# EAGLE board core_manual (EAGLE 6.4)
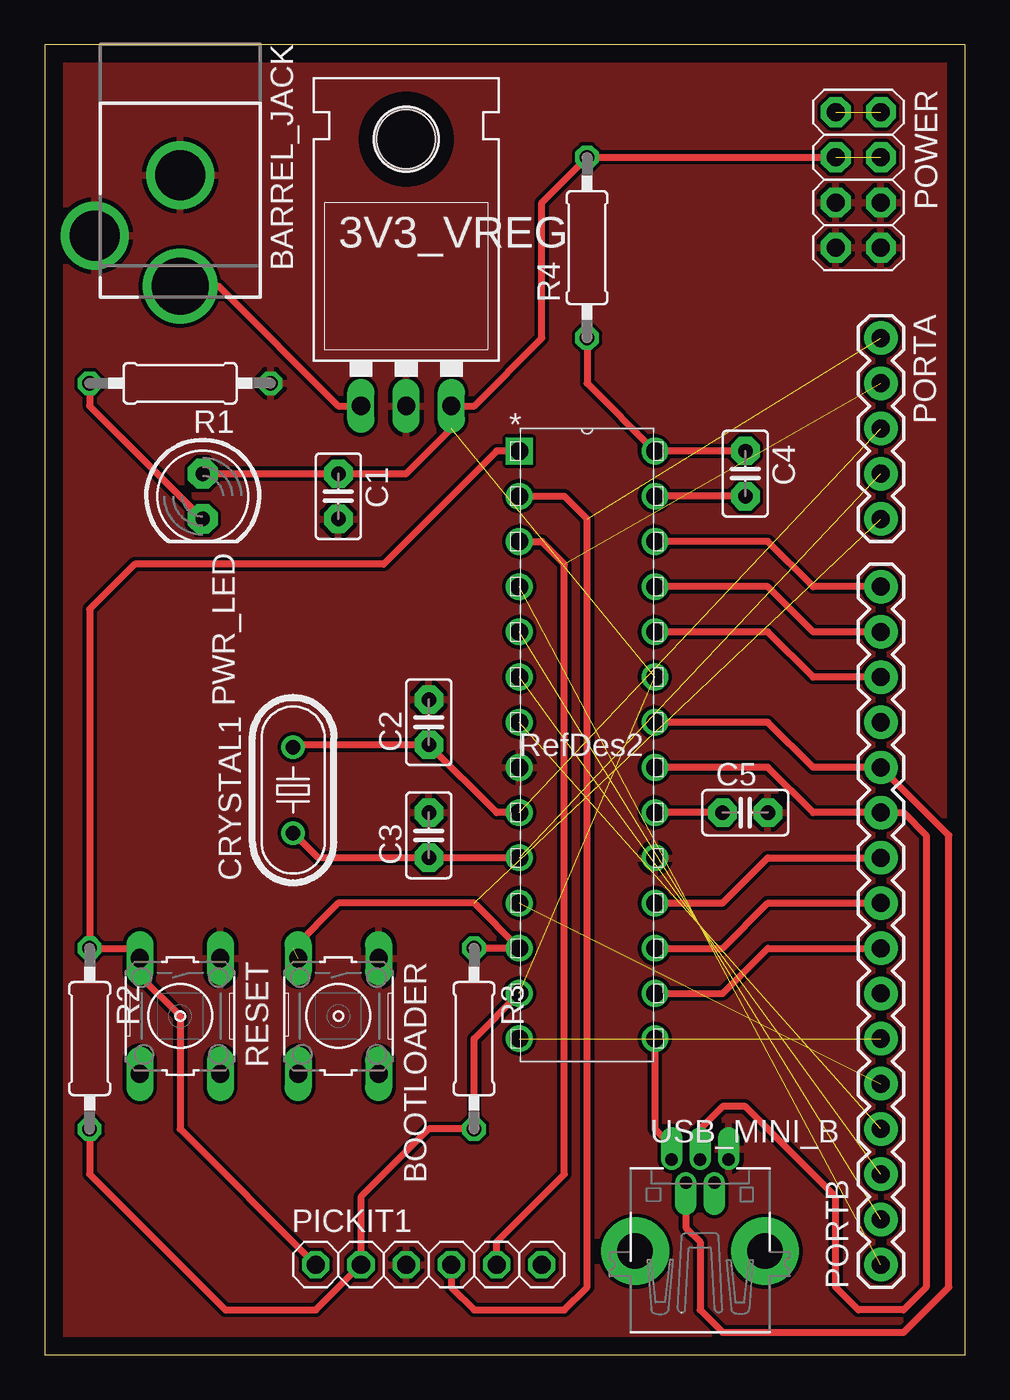
[diagram p0: board, top side]
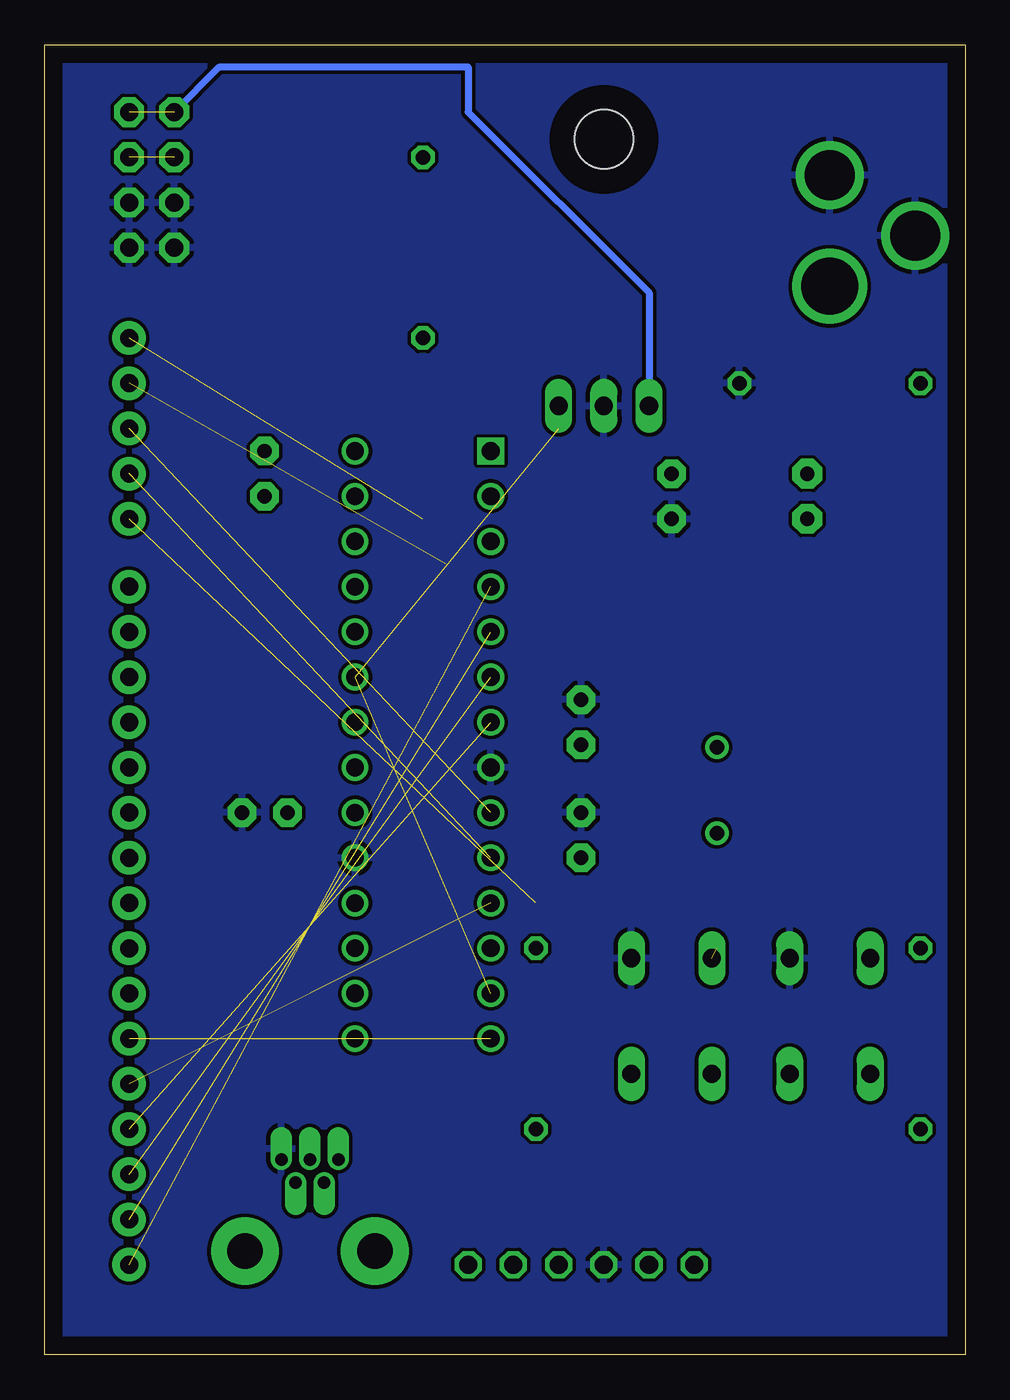
[diagram p1: board, bottom side, seen from below]

Size 51.74 x 73.65 mm. Coordinates in mm from the lower left corner, seen from the top.
Outline: 0,0 51.74,0 51.74,73.65 0,73.65 0,0
Copper layers (1*16): Top 0.035mm / dielectric 1.5mm / Bottom 0.035mm
Design rules "default": minimum track width 10mil, minimum drill 24mil, track to track 8mil, track to pad 8mil, pad to pad 8mil, via to via 8mil, smd to smd 8mil, copper to edge 40mil, drill to drill 8mil, minimum pad ring 10mil, minimum via ring 8mil, stop-mask expansion 4mil, vias tented up to drill 0mil, thermal gap 10mil

## Footprints (pad centres in the part's own frame; a part is rotated, then mirrored left to right if it is on the bottom)
TO-220-ALT = drill 1.016 long: GND 0,-3.81; IN -2.54,-3.81; OUT 2.54,-3.81 | hole 3.302: 0,11.176
DCJACK_2MM_PTH = drill 2.8: GND 0,7.35; GNDBREAK 4.8,10.75 | drill 3.2: PWR 0,13.6
B3F-10XX = drill 1.016 long: 1 -3.251,2.261; 2 3.251,2.261; 3 -3.251,-2.261; 4 3.251,-2.261
C2.5-2 = drill 0.813 pad 1.6 octagon: 1 -1.27,0; 2 1.27,0
HC49U-V = drill 0.813: 1 -2.413,0; 2 2.413,0
1X06 = drill 1.016 octagon: 1 -6.35,0; 2 -3.81,0; 3 -1.27,0; 4 1.27,0; 5 3.81,0; 6 6.35,0
1X05 = drill 1.016 pad 1.88: 1 0,0; 2 2.54,0; 3 5.08,0; 4 7.62,0; 5 10.16,0
1X16 = drill 1.016 pad 1.88: 1 0,0; 2 2.54,0; 3 5.08,0; 4 7.62,0; 5 10.16,0; 6 12.7,0; 7 15.24,0; 8 17.78,0; 9 20.32,0; 10 22.86,0; 11 25.4,0; 12 27.94,0; 13 30.48,0; 14 33.02,0; 15 35.56,0; 16 38.1,0
2X04 = drill 1.016 pad 1.676 octagon: 1 -3.81,-1.27; 2 -3.81,1.27; 3 -1.27,-1.27; 4 -1.27,1.27; 5 1.27,-1.27; 6 1.27,1.27; 7 3.81,-1.27; 8 3.81,1.27
LED5MM = drill 0.813 pad 1.676 octagon: A -1.27,0; K 1.27,0
0207/10 = drill 0.813 octagon: 1 -5.08,0; 2 5.08,0
SPDIP28_300MC = drill 0.991 square: 1 -7.62,33.02 | drill 0.991: 2 -7.62,30.48; 3 -7.62,27.94; 4 -7.62,25.4; 5 -7.62,22.86; 6 -7.62,20.32; 7 -7.62,17.78; 8 -7.62,15.24; 9 -7.62,12.7; 10 -7.62,10.16; 11 -7.62,7.62; 12 -7.62,5.08; 13 -7.62,2.54; 14 -7.62,0; 15 0,0; 16 0,2.54; 17 0,5.08; 18 0,7.62; 19 0,10.16; 20 0,12.7; 21 0,15.24; 22 0,17.78; 23 0,20.32; 24 0,22.86; 25 0,25.4; 26 0,27.94; 27 0,30.48; 28 0,33.02
USB-MINIB-THM-MOLEX = drill 0.7 offset: D+ 0,9.72; D- -0.8,8.42; GND 1.6,9.72; ID 0.8,8.42; VBUS -1.6,9.72 | drill 2 pad 3.81: GND1 -3.65,4.57; GND4 3.65,4.57

## Placement (x,y rotation side)
3V3_VREG  3.3  [TO-220-ALT]  20.32,57.15 0 top
BARREL_JACK  [DCJACK_2MM_PTH]  7.62,73.66 180 top
BOOTLOADER  [B3F-10XX]  16.51,19.05 270 top
C1  .1uF  [C2.5-2]  16.51,48.26 270 top
C2  22pF  [C2.5-2]  21.59,35.56 90 top
C3  22pF  [C2.5-2]  21.59,29.21 90 top
C4  .1uF  [C2.5-2]  39.37,49.53 270 top
C5  .1uF  [C2.5-2]  39.37,30.48 0 top
CRYSTAL1  20M  [HC49U-V]  13.97,31.75 90 top
PICKIT1  [1X06]  21.59,5.08 0 top
PORTA  [1X05]  46.99,57.15 270 top
PORTB  M16PTH  [1X16]  46.99,5.08 90 top
POWER  [2X04]  45.72,66.04 270 top
PWR_LED  [LED5MM]  8.89,48.26 270 top
R1  47  [0207/10]  7.62,54.61 180 top
R2  10K  [0207/10]  2.54,17.78 270 top
R3  10K  [0207/10]  24.13,17.78 270 top
R4  10K  [0207/10]  30.48,62.23 90 top
RESET  [B3F-10XX]  7.62,19.05 270 top
U1  PIC32MX230F064B-  [SPDIP28_300MC]  34.29,17.78 0 top
USB_MINI_B  [USB-MINIB-THM-MOLEX]  36.83,1.27 0 top

## Library data of the parts
3V3_VREG = SparkFun-PowerIC
BARREL_JACK PICKIT1 POWER PWR_LED USB_MINI_B = adafruit
BOOTLOADER RESET = switch-omron; MPN: B3F-1000; OC_FARNELL: 176432; OC_NEWARK: 36M3542
C1-C5 = capacitor-wima
CRYSTAL1 = crystal; OC_FARNELL: 1666969; OC_NEWARK: unknown
PORTA PORTB = SparkFun-Connectors
R1-R4 = resistor
U1 = uSensor

## Nets
+3V3: 3V3_VREG.OUT C1.1 PICKIT1.2 POWER.3 POWER.4 PWR_LED.A R2.2 R3.2 R4.2 U1.13 U1.23
+5V: 3V3_VREG.IN BARREL_JACK.PWR POWER.1 POWER.2
AVDD: C4.1 R4.1 U1.28
AVSS: C4.2 U1.27
D+: PORTB.11 U1.21 USB_MINI_B.D+
D-: PORTB.12 U1.22 USB_MINI_B.D-
GND: 3V3_VREG.GND BARREL_JACK.GND BARREL_JACK.GNDBREAK BOOTLOADER.1 C1.2 C2.2 C3.2 C5.2 PICKIT1.3 POWER.5 POWER.6 POWER.7 POWER.8 R1.1 RESET.1 U1.8 U1.19 USB_MINI_B.GND
MCLR: PICKIT1.1 R2.1 RESET.3 U1.1
N$5: PWR_LED.K R1.2
OSC1: C2.1 CRYSTAL1.2 PORTA.3 U1.9
OSC2: C3.1 CRYSTAL1.1 PORTA.4 U1.10
RA0: PICKIT1.4 PORTA.1 U1.2
RA1: PICKIT1.5 PORTA.2 U1.3
RA4: BOOTLOADER.3 PORTA.5 R3.1 U1.12
RB0: PORTB.1 U1.4
RB1: PORTB.2 U1.5
RB2: PORTB.3 U1.6
RB3: PORTB.4 U1.7
RB4: PORTB.5 U1.11
RB5: PORTB.6 U1.14
RB7: PORTB.8 U1.16
RB8: PORTB.9 U1.17
RB9: PORTB.10 U1.18
RB13: PORTB.14 U1.24
RB14: PORTB.15 U1.25
RB15: PORTB.16 U1.26
VBUS: U1.15 USB_MINI_B.VBUS
VCAP: C5.1 U1.20

## Tracks (layer width: path | path; a pad name or v marks a point on that pad's centre or on a via)
+3V3  (3 unrouted)
  Top 0.406: PWR_LED.A C1.1 20.32,49.53 22.86,52.07 3V3_VREG.OUT 24.13,53.34 27.94,57.15 27.94,64.77 R4.2 POWER.3 | R2.2 2.54,10.16 10.16,2.54 15.24,2.54 PICKIT1.2 17.78,8.89 21.59,12.7 R3.2 24.13,17.78 U1.13
+5V  (1 unrouted)
  Top 0.406: BARREL_JACK.PWR 9.79,60.06 16.51,53.34 3V3_VREG.IN
  Bottom 0.406: POWER.1 41.91,72.39 27.94,72.39 27.94,69.85 17.78,59.69 3V3_VREG.IN
AVDD
  Top 0.406: C4.1 U1.28 30.48,54.61 R4.1
AVSS
  Top 0.406: C4.2 U1.27
D+
  Top 0.406: USB_MINI_B.D+ 36.83,12.7 38.1,13.97 39.37,13.97 44.45,8.89 44.45,3.81 45.72,2.54 48.26,2.54 49.53,3.81 49.53,29.21 48.26,30.48 PORTB.11 43.18,30.48 40.64,33.02 U1.21
D-
  Top 0.406: USB_MINI_B.D- 36.03,7.15 36.83,6.35 36.83,2.54 38.1,1.27 48.26,1.27 50.8,3.81 50.8,29.21 PORTB.12 43.18,33.02 40.64,35.56 U1.22
GND
  pour Top: -6.35,85.09 -6.35,-26.67 115.57,-26.67 115.57,97.79 -6.35,97.79
  pour Bottom: -5.08,76.2 54.61,76.2 54.61,-6.35 -5.08,-6.35
MCLR
  Top 0.406: U1.1 25.4,50.8 19.05,44.45 5.08,44.45 2.54,41.91 R2.1 4.8,22.86 RESET.3 5.36,21.31 7.62,19.05 7.62,12.7 PICKIT1.1
N$5
  Top 0.406: R1.2 2.54,53.34 PWR_LED.K
OSC1  (1 unrouted)
  Top 0.406: U1.9 25.4,30.48 C2.1 14.1,34.29 CRYSTAL1.2
OSC2  (1 unrouted)
  Top 0.406: U1.10 C3.1 15.37,27.94 CRYSTAL1.1
RA0  (1 unrouted)
  Top 0.406: U1.2 29.21,48.26 30.48,46.99 30.48,3.81 29.21,2.54 24.13,2.54 22.86,3.81 PICKIT1.4
RA1  (1 unrouted)
  Top 0.406: PICKIT1.5 25.4,6.35 29.21,10.16 29.21,44.45 27.94,45.72 U1.3
RA4  (2 unrouted)
  Top 0.406: 13.97,22.86 16.51,25.4 24.13,25.4 U1.12 R3.1
RB0  (1 unrouted)
RB1  (1 unrouted)
RB2  (1 unrouted)
RB3  (1 unrouted)
RB4  (1 unrouted)
RB5  (1 unrouted)
RB7
  Top 0.406: U1.16 38.1,20.32 40.64,22.86 PORTB.8
RB8
  Top 0.406: U1.17 38.1,22.86 40.64,25.4 PORTB.9
RB9
  Top 0.406: U1.18 38.1,25.4 40.64,27.94 PORTB.10
RB13
  Top 0.406: PORTB.14 43.18,38.1 40.64,40.64 U1.24
RB14
  Top 0.406: PORTB.15 43.18,40.64 40.64,43.18 U1.25
RB15
  Top 0.406: PORTB.16 43.18,43.18 40.64,45.72 U1.26
VBUS
  Top 0.406: U1.15 34.29,12.7 35.56,11.43 35.56,11.32 USB_MINI_B.VBUS
VCAP
  Top 0.406: C5.1 U1.20